# Altium PCB inversor_rev3.PcbDoc
Units mm, origin at the board's own origin, x right, y up, seen from the top; angles counter-clockwise.
Board outline 100.08 x 99.8 mm, 2 copper layers (Top Layer, Bottom Layer); 102 components, 66 nets, 314 pads, 278 vias.
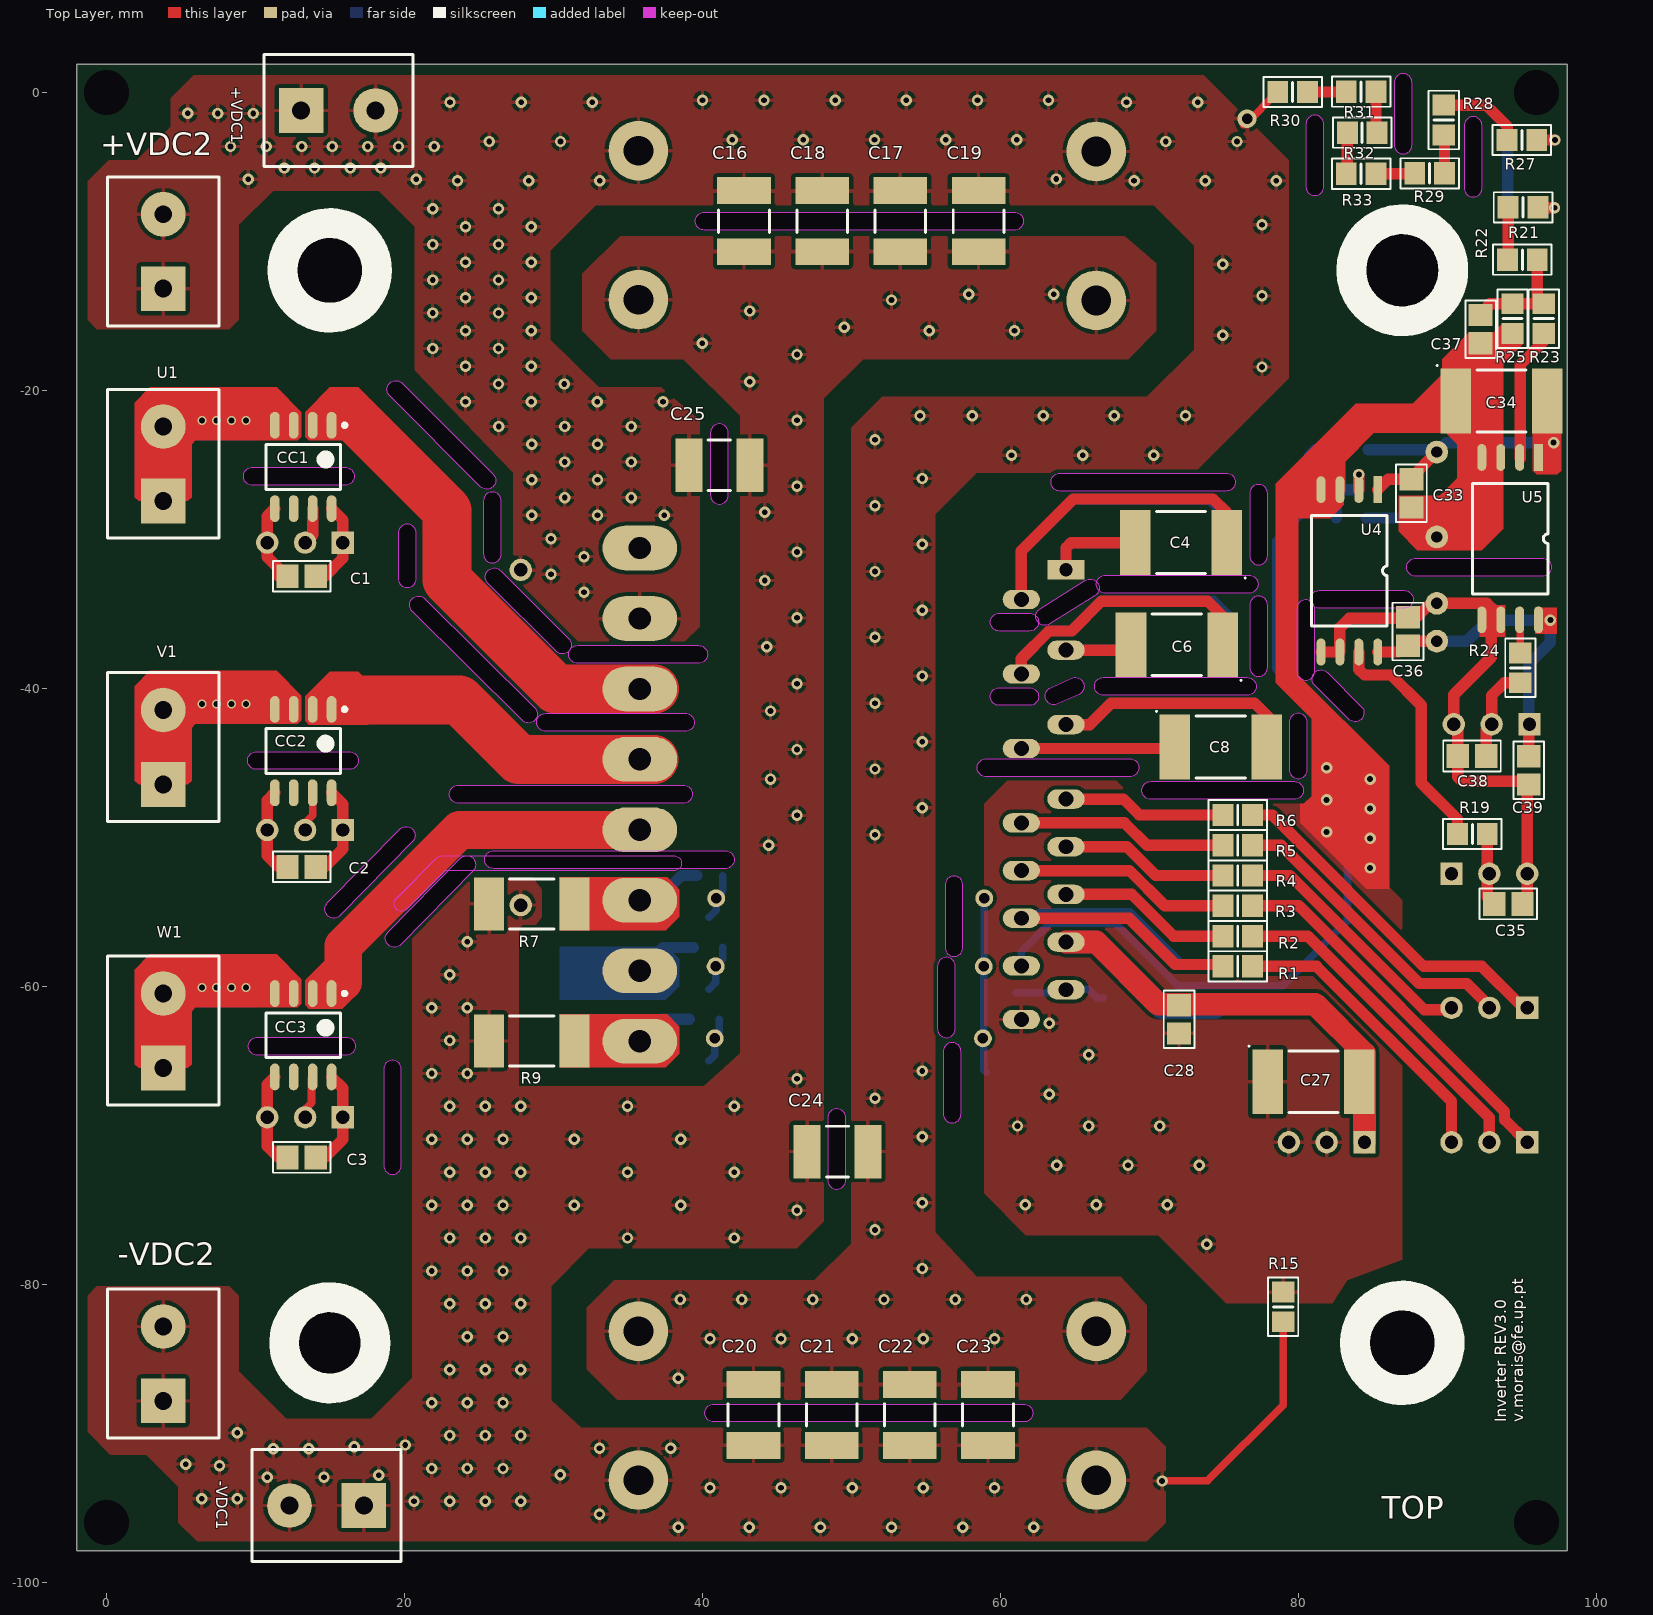
[diagram p0: Top Layer view]
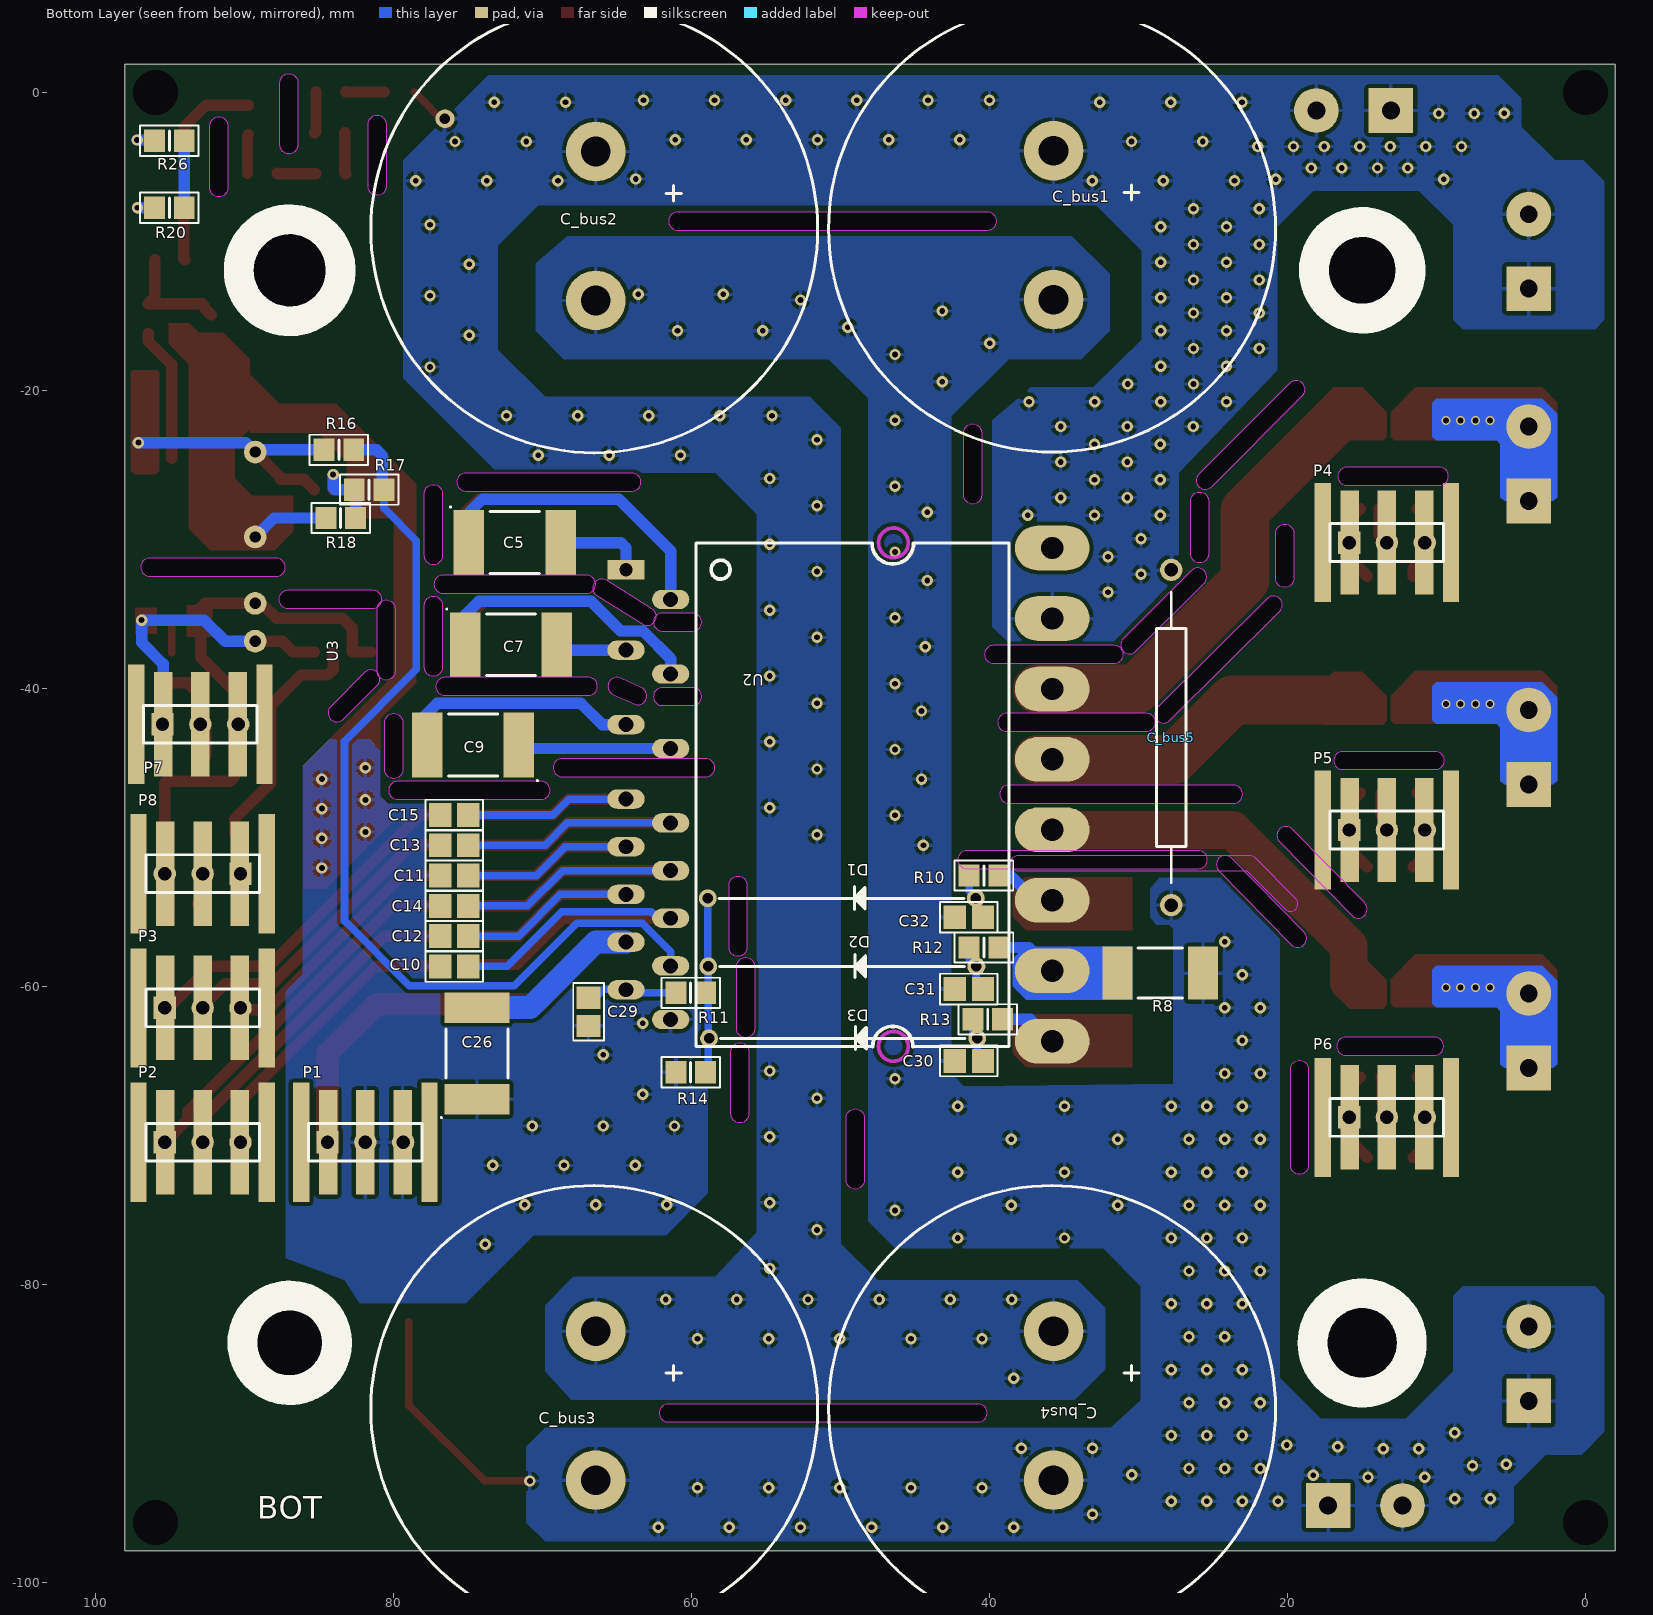
[diagram p1: Bottom Layer view, seen from below]

## Layer stack, top to bottom
Top Solder: solder mask 0.0102, Solder Resist, Dk 3.5
Top Layer: signal copper 0.0356
Dielectric 1: dielectric 0.32, FR-4, Dk 4.8
Bottom Layer: signal copper 0.0356
Bottom Solder: solder mask 0.0102, Solder Resist, Dk 3.5

## Board outline
-2,-97.905 98.075,-97.905 98.075,1.892 -2,1.892
cut-out: 83.395,-42.069 81.109,-39.783 cw(c81.534,-39.358) 81.959,-38.933 84.245,-41.219 cw(c83.82,-41.644) 84.42,-41.644 cw(c83.82,-41.644)
cut-out: 79.918,-38.85 ccw(c80.518,-38.85) 81.118,-38.85 81.118,-34.659 ccw(c80.518,-34.659) 79.918,-34.659
cut-out: 81.407,-34.624 cw(c81.407,-34.024) 81.407,-33.424 87.122,-33.424 cw(c87.122,-34.024) 87.722,-34.024 cw(c87.122,-34.024) 87.122,-34.624
cut-out: 87.884,-32.465 cw(c87.884,-31.865) 87.884,-31.265 96.393,-31.265 cw(c96.393,-31.865) 96.993,-31.865 cw(c96.393,-31.865) 96.393,-32.465
cut-out: 91.144,-6.414 ccw(c91.745,-6.414) 92.345,-6.414 92.345,-2.223 ccw(c91.745,-2.223) 91.144,-2.223
cut-out: 86.445,-3.519 ccw(c87.046,-3.519) 87.646,-3.519 87.646,0.672 ccw(c87.046,0.672) 86.445,0.672
cut-out: 80.527,-6.313 ccw(c81.128,-6.313) 81.728,-6.313 81.728,-2.122 ccw(c81.128,-2.122) 80.527,-2.122
cut-out: 64.008,-26.75 cw(c64.008,-26.15) 64.008,-25.55 75.184,-25.55 cw(c75.184,-26.15) 75.784,-26.15 cw(c75.184,-26.15) 75.184,-26.75
cut-out: 76.743,-31.103 ccw(c77.343,-31.103) 77.943,-31.103 77.943,-26.912 ccw(c77.343,-26.912) 76.743,-26.912
cut-out: 76.743,-38.596 ccw(c77.343,-38.596) 77.943,-38.596 77.943,-34.405 ccw(c77.343,-34.405) 76.743,-34.405
cut-out: 67.056,-33.608 cw(c67.056,-33.008) 67.056,-32.408 76.708,-32.408 cw(c76.708,-33.008) 77.308,-33.008 cw(c76.708,-33.008) 76.708,-33.608
cut-out: 63.31,-35.676 cw(c62.992,-35.167) 62.674,-34.658 65.722,-32.753 cw(c66.04,-33.262) 66.64,-33.262 cw(c66.04,-33.262) 66.358,-33.771
cut-out: 59.944,-36.148 cw(c59.944,-35.548) 59.944,-34.948 61.976,-34.948 cw(c61.976,-35.548) 62.576,-35.548 cw(c61.976,-35.548) 61.976,-36.148
cut-out: 59.944,-41.148 cw(c59.944,-40.548) 59.944,-39.948 61.976,-39.948 cw(c61.976,-40.548) 62.576,-40.548 cw(c61.976,-40.548) 61.976,-41.148
cut-out: 63.875,-41.048 cw(c63.627,-40.501) 63.379,-39.954 64.776,-39.319 cw(c65.024,-39.866) 65.624,-39.866 cw(c65.024,-39.866) 65.272,-40.413
cut-out: 66.929,-40.466 cw(c66.929,-39.866) 66.929,-39.266 76.581,-39.266 cw(c76.581,-39.866) 77.181,-39.866 cw(c76.581,-39.866) 76.581,-40.466
cut-out: 79.41,-45.454 ccw(c80.01,-45.454) 80.61,-45.454 80.61,-42.279 ccw(c80.01,-42.279) 79.41,-42.279
cut-out: 70.104,-47.451 cw(c70.104,-46.851) 70.104,-46.251 79.756,-46.251 cw(c79.756,-46.851) 80.356,-46.851 cw(c79.756,-46.851) 79.756,-47.451
cut-out: 59.055,-45.927 cw(c59.055,-45.327) 59.055,-44.727 68.707,-44.727 cw(c68.707,-45.327) 69.307,-45.327 cw(c68.707,-45.327) 68.707,-45.927
cut-out: 40.767,-89.246 cw(c40.767,-88.646) 40.767,-88.046 61.595,-88.046 cw(c61.595,-88.646) 62.195,-88.646 cw(c61.595,-88.646) 61.595,-89.246
cut-out: 56.169,-68.568 ccw(c56.769,-68.568) 57.369,-68.568 57.369,-64.377 ccw(c56.769,-64.377) 56.169,-64.377
cut-out: 55.788,-62.853 ccw(c56.388,-62.853) 56.988,-62.853 56.988,-58.662 ccw(c56.388,-58.662) 55.788,-58.662
cut-out: 56.296,-57.392 ccw(c56.896,-57.392) 57.496,-57.392 57.496,-53.201 ccw(c56.896,-53.201) 56.296,-53.201
cut-out: 48.422,-73.013 ccw(c49.022,-73.013) 49.622,-73.013 49.622,-68.822 ccw(c49.022,-68.822) 48.422,-68.822
cut-out: 40.132,-9.236 cw(c40.132,-8.636) 40.132,-8.036 60.96,-8.036 cw(c60.96,-8.636) 61.56,-8.636 cw(c60.96,-8.636) 60.96,-9.236
cut-out: 40.548,-27.039 ccw(c41.148,-27.039) 41.748,-27.039 41.748,-22.848 ccw(c41.148,-22.848) 40.548,-22.848
cut-out: 9.804,-26.361 cw(c9.804,-25.761) 9.804,-25.161 16.027,-25.161 cw(c16.027,-25.761) 16.627,-25.761 cw(c16.027,-25.761) 16.027,-26.361
cut-out: 25.102,-26.46 19.006,-20.364 cw(c19.431,-19.939) 19.856,-19.514 25.952,-25.61 cw(c25.527,-26.035) 26.127,-26.035 cw(c25.527,-26.035)
cut-out: 25.308,-30.976 ccw(c25.908,-30.976) 26.508,-30.976 26.508,-27.42 ccw(c25.908,-27.42) 25.308,-27.42
cut-out: 30.182,-37.509 25.61,-32.937 cw(c26.035,-32.512) 26.46,-32.087 31.032,-36.659 cw(c30.607,-37.084) 31.207,-37.084 cw(c30.607,-37.084)
cut-out: 31.623,-38.319 cw(c31.623,-37.719) 31.623,-37.119 39.751,-37.119 cw(c39.751,-37.719) 40.351,-37.719 cw(c39.751,-37.719) 39.751,-38.319
cut-out: 19.593,-32.627 ccw(c20.193,-32.627) 20.793,-32.627 20.793,-29.579 ccw(c20.193,-29.579) 19.593,-29.579
cut-out: 27.909,-42.153 20.532,-34.831 cw(c20.955,-34.405) 21.378,-33.979 28.755,-41.301 cw(c28.332,-41.727) 28.932,-41.727 cw(c28.332,-41.727)
cut-out: 29.475,-42.879 cw(c29.475,-42.279) 29.475,-41.679 38.862,-41.679 cw(c38.862,-42.279) 39.462,-42.279 cw(c38.862,-42.279) 38.862,-42.879
cut-out: 10.084,-45.445 cw(c10.084,-44.844) 10.084,-44.244 16.307,-44.244 cw(c16.307,-44.844) 16.907,-44.844 cw(c16.307,-44.844) 16.307,-45.445
cut-out: 23.622,-47.705 cw(c23.622,-47.105) 23.622,-46.505 38.735,-46.505 cw(c38.735,-47.105) 39.335,-47.105 cw(c38.735,-47.105) 38.735,-47.705
cut-out: 25.984,-52.1 cw(c25.984,-51.499) 25.984,-50.899 41.54,-50.899 cw(c41.54,-51.499) 42.141,-51.499 cw(c41.54,-51.499) 41.54,-52.1
cut-out: 19.758,-57.203 cw(c19.329,-56.782) 18.9,-56.362 23.752,-51.409 cw(c24.181,-51.829) 24.781,-51.829 cw(c24.181,-51.829) 24.61,-52.25
cut-out: 15.694,-55.247 cw(c15.265,-54.827) 14.836,-54.406 19.688,-49.453 cw(c20.117,-49.874) 20.717,-49.874 cw(c20.117,-49.874) 20.546,-50.294
cut-out: 10.135,-64.622 cw(c10.135,-64.021) 10.135,-63.421 16.104,-63.421 cw(c16.104,-64.021) 16.704,-64.021 cw(c16.104,-64.021) 16.104,-64.622
cut-out: 18.602,-72.022 ccw(c19.202,-72.022) 19.803,-72.022 19.803,-65.571 ccw(c19.202,-65.571) 18.602,-65.571

## Design rules (kind name [scope] priority, off if disabled: settings)
Clearance [All] p1: gap=0.254 ignorepadtopadclearanceinfootprint=FALSE
Height [All] p1: minheight=0 maxheight=254 prefheight=12.7
HoleSize [All] p1: absolutevalues=TRUE maxlimit=25.4 minlimit=0.025 maxpercent=80.000 minpercent=20.000
PlaneClearance [All] p1: clearance=2.54
PolygonConnect [All] p1: connectstyle=Relief reliefconductorwidth=0.254 reliefentries=4 polygonreliefangle="90 Angle" airgapwidth=0.254
RoutingVias [All] p1: holewidth=0.711 width=1.27 viastyle="Through Hole" minholewidth=0.711 minwidth=1.27 maxholewidth=0.711 maxwidth=1.27
SilkToSilkClearance [All] p1: silktosilkclearance=0.025
SilkToSolderMaskClearance [IsPad] p1: minsilkscreentomaskgap=0.025 clearancetoexposedcopper=TRUE
SolderMaskExpansion [All] p1: expansion=0.102
Width [All] p1: maxlimit=3.81 minlimit=0.254 preferedwidth=0.762
25 further rules are at their usual default settings.

## Components (designator, comment, footprint, x,y, rotation, side; value= is the part's Value field where it differs from the comment)
+VDC1 "P 2p 5mm" connector1x2_parafuso 15.57,-1.207 r0 top
+VDC2 "P 2p 5mm" connector1x2_parafuso 3.81,-10.668 r90 top
-VDC1 "P 2p 5mm" connector1x2_parafuso 14.783,-94.857 r180 top
-VDC2 "P 2p 5mm" connector1x2_parafuso 3.81,-85.332 r90 top
C1 "C 10uF 0805 MLCC 25V X5R" CAPC_0805 13.106,-32.475 r0 top
C2 "C 10uF 0805 MLCC 25V X5R" CAPC_0805 13.106,-51.982 r0 top
C3 "C 10uF 0805 MLCC 25V X5R" CAPC_0805 13.106,-71.489 r0 top
C4 "C 10uF 2917 TANT 50V" CAPC_2917 72.136,-30.214 r180 top
C5 "C 10uF 2917 TANT 50V" CAPC_2917 71.882,-30.214 r180 bottom
C6 "C 10uF 2917 TANT 50V" CAPC_2917 71.855,-37.072 r180 top
C7 "C 10uF 2917 TANT 50V" CAPC_2917 72.136,-37.072 r180 bottom
C8 "C 10uF 2917 TANT 50V" CAPC_2917 74.803,-43.93 r0 top
C9 "C 10uF 2917 TANT 50V" CAPC_2917 74.676,-43.803 r0 bottom
C10 "C 1nF 0805 MLCC 50V X7R" CAPC_0805 75.946,-58.662 r180 bottom
C11 "C 1nF 0805 MLCC 50V X7R" CAPC_0805 75.946,-52.566 r180 bottom
C12 "C 1nF 0805 MLCC 50V X7R" CAPC_0805 75.946,-56.63 r180 bottom
C13 "C 1nF 0805 MLCC 50V X7R" CAPC_0805 75.946,-50.534 r180 bottom
C14 "C 1nF 0805 MLCC 50V X7R" CAPC_0805 75.946,-54.598 r180 bottom
C15 "C 1nF 0805 MLCC 50V X7R" CAPC_0805 75.946,-48.502 r180 bottom
C16 "C 100nF MLCC 1812 X7R 1kV" CAPC_1812 42.799,-8.636 r90 top
C17 "C 100nF MLCC 1812 X7R 1kV" CAPC_1812 53.298,-8.636 r90 top
C18 "C 100nF MLCC 1812 X7R 1kV" CAPC_1812 48.048,-8.636 r90 top
C19 "C 100nF MLCC 1812 X7R 1kV" CAPC_1812 58.547,-8.636 r90 top
C20 "C 100nF MLCC 1812 X7R 1kV" CAPC_1812 43.434,-88.773 r90 top
C21 "C 100nF MLCC 1812 X7R 1kV" CAPC_1812 48.683,-88.773 r90 top
C22 "C 100nF MLCC 1812 X7R 1kV" CAPC_1812 53.933,-88.773 r90 top
C23 "C 100nF MLCC 1812 X7R 1kV" CAPC_1812 59.182,-88.773 r90 top
C24 "C 100nF MLCC 1812 X7R 1kV" CAPC_1812 49.073,-71.095 r0 top
C25 "C 100nF MLCC 1812 X7R 1kV" CAPC_1812 41.148,-25.019 r180 top
C26 "C 10uF 2917 TANT 50V" CAPC_2917 74.422,-64.504 r90 bottom
C27 "C 10uF 2917 TANT 50V" CAPC_2917 81.026,-66.409 r0 top
C28 "C 10uF 0805 MLCC 25V X5R" CAPC_0805 72.009,-62.218 r90 top
C29 "C 10nF 0805 MLCC 50V X7R" CAPC_0805 66.929,-61.71 r90 bottom
C30 "C 10nF 0805 MLCC 50V X7R" CAPC_0805 41.402,-65.012 r180 bottom
C31 "C 10nF 0805 MLCC 50V X7R" CAPC_0805 41.402,-60.186 r180 bottom
C32 "C 10nF 0805 MLCC 50V X7R" CAPC_0805 41.402,-55.36 r180 bottom
C33 "C 10uF 0805 MLCC 25V X5R" CAPC_0805 87.605,-26.912 r90 top
C34 "C 10uF 2917 TANT 50V" CAPC_2917 93.65,-20.714 r0 top
C35 "C1uF 0805 MLCC 50V X5R" CAPC_0805 94.107,-54.471 r180 top
C36 "C 10uF 0805 MLCC 25V X5R" CAPC_0805 87.376,-36.183 r270 top
C37 "C1uF 0805 MLCC 50V X5R" CAPC_0805 92.253,-15.888 r90 top
C38 "C1uF 0805 MLCC 50V X5R" CAPC_0805 91.669,-44.54 r0 top
C39 "C 10uF 0805 MLCC 25V X5R" CAPC_0805 95.479,-45.505 r90 top
C_bus1 "C 470uF EleCap TH 450V" Capacitor_DCBUS 30.48,-14.212 r90 bottom
C_bus2 "C 470uF EleCap TH 450V" Capacitor_DCBUS 61.214,-14.263 r90 bottom
C_bus3 "C 470uF EleCap TH 450V" Capacitor_DCBUS 61.214,-93.46 r90 bottom
C_bus4 "C 470uF EleCap TH 450V" Capacitor_DCBUS 30.48,-93.46 r90 bottom
C_bus5 "C 470nF PPCap TH 630V" Snubber_cap_0.47uF 27.813,-54.547 r90 bottom
CC1 "IC CC 30A SO-8" CC6303_SOP8 13.208,-25.134 r270 top
CC2 "IC CC 30A SO-8" CC6303_SOP8 13.208,-44.209 r270 top
CC3 "IC CC 30A SO-8" CC6303_SOP8 13.208,-63.285 r270 top
D1 "IC DIO generic" Diode_th 40.928,-54.09 r0 bottom
D2 "IC DIO generic" Diode_th 40.894,-58.662 r0 bottom
D3 "IC DIO generic" Diode_th 40.84,-63.494 r0 bottom
P1 "P 8p 2.54 SR DW 3P" MOLEX_3p_105431_1103 81.915,-70.473 r180 bottom
P2 "P 8p 2.54 SR DW 3P" MOLEX_3p_105431_1103 92.837,-70.473 r180 bottom
P3 "P 8p 2.54 SR DW 3P" MOLEX_3p_105431_1103 92.837,-61.446 r180 bottom
P4 "P 8p 2.54 SR DW 3P" MOLEX_3p_105431_1103 13.335,-30.214 r180 bottom
P5 "P 8p 2.54 SR DW 3P" MOLEX_3p_105431_1103 13.335,-49.505 r180 bottom
P6 "P 8p 2.54 SR DW 3P" MOLEX_3p_105431_1103 13.335,-68.797 r180 bottom
P7 "P 8p 2.54 SR DW 3P" MOLEX_3p_105431_1103 92.989,-42.406 r180 bottom
P8 "P 8p 2.54 SR DW 3P" MOLEX_3p_105431_1103 92.837,-52.439 r0 bottom
R1 "R 100 1/8W 0805 1%" RESC_0805 75.946,-58.662 r0 top
R2 "R 100 1/8W 0805 1%" RESC_0805 75.946,-56.63 r0 top
R3 "R 100 1/8W 0805 1%" RESC_0805 75.946,-54.598 r0 top
R4 "R 100 1/8W 0805 1%" RESC_0805 75.946,-52.566 r0 top
R5 "R 100 1/8W 0805 1%" RESC_0805 75.946,-50.534 r0 top
R6 "R 100 1/8W 0805 1%" RESC_0805 75.946,-48.502 r0 top
R7 "R 0039 3W 6432 1%" RESC6432X09M 28.55,-54.471 r180 top
R8 "R 0039 3W 6432 1%" RESC6432X09M 28.55,-59.119 r180 bottom
R9 "R 0039 3W 6432 1%" RESC6432X09M 28.55,-63.666 r180 top
R10 "R 100 1/8W 0805 1%" RESC_0805 40.386,-52.566 r0 bottom
R11 "R 1k8 1/8W 0805 1%" RESC_0805 60.071,-60.44 r0 bottom
R12 "R 100 1/8W 0805 1%" RESC_0805 40.386,-57.392 r0 bottom
R13 "R 100 1/8W 0805 1%" RESC_0805 40.132,-62.218 r0 bottom
R14 "R 3K 1/8W 0805 1%" RESC_0805 60.071,-65.774 r180 bottom
R15 "R 0 1/8W 0805" RESC_0805 78.994,-81.522 r270 top
R16 "R 3k6 1/8W 0805 1%" RESC_0805 83.693,-23.991 r180 bottom
R17 "R 49k9 1/8W 0805 1%" RESC_0805 81.661,-26.658 r0 bottom
R18 "R 49k9 1/8W 0805 1%" RESC_0805 83.566,-28.563 r180 bottom
R19 "R 330 1/8 0805 1%" RESC_0805 91.694,-49.772 r0 top
R20 "R 30k 1/8W 0805 1%" RESC_0805 95.072,-7.735 r0 bottom
R21 "R 30k 1/8W 0805 1%" RESC_0805 95.098,-7.71 r180 top
R22 "R 30k 1/8W 0805 1%" RESC_0805 95.047,-11.215 r0 top
R23 "R 30k 1/8W 0805 1%" RESC_0805 96.495,-15.177 r270 top
R24 "R 330 1/8 0805 1%" RESC_0805 94.92,-38.621 r270 top
R25 "R 150R 1/8W 0805 1%" RESC_0805 94.386,-15.177 r90 top
R26 "R 30k 1/8W 0805 1%" RESC_0805 95.072,-3.239 r0 bottom
R27 "R 30k 1/8W 0805 1%" RESC_0805 95.021,-3.188 r180 top
R28 "R 30k 1/8W 0805 1%" RESC_0805 89.774,-1.845 r270 top
R29 "R 30k 1/8W 0805 1%" RESC_0805 88.824,-5.424 r180 top
R30 "R 30k 1/8W 0805 1%" RESC_0805 79.629,0.037 r0 top
R31 "R 30k 1/8W 0805 1%" RESC_0805 84.226,0.063 r0 top
R32 "R 30k 1/8W 0805 1%" RESC_0805 84.303,-2.693 r180 top
R33 "R 30k 1/8W 0805 1%" RESC_0805 84.226,-5.449 r0 top
U1 "P 2p 5mm" connector1x2_parafuso 3.81,-24.92 r90 top
U2 "IC IGBT IPM  IKCM30F60GA" ikcm30f60ga 64.414,-32.032 r180 bottom
U3 "IC CC/CC 1W 5V" DC/DC_ISO 89.306,-36.833 r90 bottom
U4 "IC AmpIso UNI AMC1311" "AMC1311 - SOIC8" 85.344,-26.658 r270 top
U5 "IC AmpIso UNI AMC1311" "AMC1311 - SOIC8" 96.139,-24.499 r270 top
V1 "P 2p 5mm" connector1x2_parafuso 3.81,-43.95 r90 top
W1 "P 2p 5mm" connector1x2_parafuso 3.81,-62.98 r90 top

## Footprints (in the part's own frame and the unit in brackets; to place one, negate y for a bottom-side part, rotate by r counter-clockwise, add the part's x,y. Pads: shape width x height; smd on the part's side, far side on the other; paste and mask are expansions set on the pad)
"AMC1311 - SOIC8" [mm]
  rect 1.8x0.6 smd: 1(0,0)
  oval 1.8x0.6 smd: 2(0,-1.27) 3(0,-2.54) 4(0,-3.81) 5(10.9,-3.81) 6(10.9,-2.54) 7(10.9,-1.27) 8(10.9,0)
  silkscreen extent 1.73,-4.44 9.17,0.64, body extent 1.7,-4.52 9.22,0.69, height 3
Capacitor_DCBUS [mm]
  round 4 hole 2: 1(0.305,5.232) 2(10.305,5.232)
  silkscreen extent -9.92,-9.67 20.08,20.33, body extent -9.67,-9.92 20.33,20.08, height 41
CAPC_0805 [mm] "Chip Capacitor, Body 2.0x1.3mm, IPC Low Density"
  rect 1.5x1.6 smd: 1(-0.95,0) 2(0.95,0)
  silkscreen extent -1.93,-1.03 1.93,1.03, body extent -1.1,-0.72 1.1,0.72, height 1.1
CAPC_1812 [mm] "Chip Capacitor, 2-Leads, Body 4,50x3,20mm, IPC Low Density"
  rect 1.8x3.6 smd: 1(-2.05,0) 2(2.05,0)
  silkscreen extent -0.75,-1.7 0.75,1.7, body extent -2.4,-1.75 2.4,1.75, height 2.6
CAPC_2917 [mm] "Chip Capacitor, 2-Leads, Body 7,30x4,20mm, IPC Medium Density"
  rect 2.05x4.35 smd: 1(-3.075,0) 2(3.075,0)
  silkscreen extent -4.36,-2.07 1.65,2.44, body extent -3.75,-2.15 3.75,2.15, height 4
CC6303_SOP8 [mm] "SOP, 8-Leads, Body 4,90x3,91mm, Pitch 1,27mm, IPC Medium Density"
  oval 1.8x0.65 smd: 1(-2.8,1.905) 2(-2.8,0.635) 3(-2.8,-0.635) 4(-2.8,-1.905) 5(2.8,-1.905) 6(2.8,-0.635) 7(2.8,0.635) 8(2.8,1.905)
  silkscreen extent -2.92,-2.5 1.5,2.91, body extent -1.9,-2.5 1.9,2.5, height 2.65
connector1x2_parafuso [mm] "Connector; Header; 2 Position"
  rect 3x3 hole 1.2: 1(-2.5,0)
  round 3 hole 1.2: 2(2.5,0)
  silkscreen extent -5,-3.75 5,3.75, body extent -4.92,-4.53 5.68,4.47, height 14.6
DC/DC_ISO [mil]
  round 60 hole 30: 1(0,0) 2(100,0) 3(275.59,0) 4(500,0)
  body extent -54,-149 572,80, height 315
Diode_th [mm]
  round 1.2 hole 0.7: 1(0,0) 2(18,0)
  silkscreen extent 0.81,-0.79 17.25,0.76, body extent -0.93,-0.75 19.07,0.77, height 1.76
ikcm30f60ga [mm]
  rect 2.5x1.3 hole 0.9: 1(0,0)
  oval 2.5x1.3 hole 1: 2(2.997,-2) 3(0,-5.4) 4(2.997,-7) 5(0,-10.4) 6(2.997,-12) 7(0,-15.4) 8(2.997,-17) 9(0,-18.6) 10(2.997,-20.2) 11(0,-21.8) 12(2.997,-23.4) 13(0,-25) 14(2.997,-26.6) 15(0,-28.2) 16(2.997,-30.2)
  oval 5x3 hole 1.5: 17(28.611,-31.655) 18(28.611,-26.925) 19(28.611,-22.195) 20(28.611,-17.465) 21(28.611,-12.735) 22(28.611,-8.005) 23(28.611,-3.275) 24(28.611,1.455)
  Top Layer keep-out circle w0.254: c17.95,-32 r1
  Top Layer keep-out circle w0.254: c17.95,1.8 r1
  silkscreen extent 4.7,-32 25.7,1.78, body extent -0.67,-33.2 29.16,3.1, height 1.3
MOLEX_3p_105431_1103 [mm] "conector 3p 2.5mm"
  rect 1.1x8 smd: 0(-4.305,0) 0(4.305,0)
  rect 1.5x1.5 hole 0.9: 1(-2.54,0)
  rect 1.24x7 smd: 1(-2.5,0) 2(0,0) 3(2.5,0)
  round 1.5 hole 0.9: 2(0,0) 3(2.54,0)
  silkscreen extent -3.81,-1.27 3.81,1.27, body extent -5.37,-4.14 5.36,4.11, height 11.3
RESC6432X09M [mm] "Chip Resistor, 2-Leads, Body 6,40x3,20mm, IPC Low Density"
  rect 2x3.55 smd: 1(-2.875,0) 2(2.875,0)
  silkscreen extent -1.5,-1.68 1.5,1.68, body extent -3.32,-1.73 3.32,1.73, height 0.9
RESC_0805 [mm] "Chip Resistor, Body 2.0x1.3mm, IPC Low Density"
  rect 1.4x1.5 smd: 1(-1,0) 2(1,0)
  silkscreen extent -1.96,-1.01 1.96,1.01, body extent -1.07,-0.7 1.08,0.7, height 0.65
Snubber_cap_0.47uF [mm]
  round 1.5 hole 0.9: 1(0,0) 2(22.5,0)
  silkscreen extent 1.5,-1 21,1, body extent -1.17,-9.45 23.67,-1.55, height 3

## Part data
+VDC1 +VDC2 -VDC1 -VDC2 U1 V1 W1: library part gen_purpose_conn_1x2, "Bloques de terminales de PCB de perfil estándar RS de 5,0 mm", Price=0,24, RS VPN=896-6696
C1 C2 C3 C28 C33 C36 C39: library part "Capacitor SMD", "Capacitores de cerâmica multicamada MLCC - SMD/SMT 10uF 25V X5R +/-10% 0805 Gen Purp", Mouser VPN=963-TMK212BBJ106KG-T, Price=0,162
C4 C5 C6 C7 C8 C9 C26 C27 C34: library part tantalum_CAP, "Condensadores de tântalo - revestimento sólido de SMD 50V 10uF 10% ESR=0.8Ohms", Mouser VPN=80-T491D106K050AT, Price=1,58
C10 C11 C12 C13 C14 C15: library part "Capacitor SMD", "Capacitores de cerâmica multicamada MLCC - SMD/SMT WCAP-CSGP 1000pF 0805 10% 50V MLCC", Mouser VPN=710-885012207086, Price=0,08
C16 C17 C18 C19 C20 C21 C22 C23 C24 C25: library part CAPACITOR_dcbus, "Capacitores de cerâmica multicamada MLCC - SMD/SMT 1000V 0.1uF X7R 1812 10% AEC-Q200", Mouser VPN=80-C1812C104KDRAUTO, Price=0,747
C29 C30 C31 C32: library part "Capacitor SMD", "Capacitores de cerâmica multicamada MLCC - SMD/SMT 10nF 50V X7R 10%", Mouser VPN=603-CC805KRX7R9BB103, Price=0,099
C35 C37 C38: library part "Capacitor SMD", "Capacitores de cerâmica multicamada MLCC - SMD/SMT 0805 50V 1uF 20% X5R", Mouser VPN=963-UMK212BJ105MG-T, Price=0,153
C_bus1 C_bus2 C_bus3 C_bus4: library part CAPACITOR_dcbus, "Capacitores eletrolíticos de alumínio - terminal de pressão 450V 470uF 20% Tol.", Mouser VPN=661-ESMR451N471MR40S, Price=6,28
C_bus5: library part CAPACITOR_dcbus, "B32653A6474K000 -  DC Film Capacitor, 0.47 µF, 630 V, Metallized PP, ± 10%, B32653 Series", Farnell VPN=9751343, Price=2,18
CC1 CC2 CC3: library part Current_Sensor_cc6303, "Sensores de Corrente de Montagem de Painel Hall Effect IC LF 30A 66 mV/A", Mouser VPN=630-ACHS-7123-000E, Price=3,47
D1 D2 D3: library part Diode, "Diodos - Fins gerais, energia, comutação Hi Conductance Fast", Mouser VPN=512-1N4148TR, Price=0,09
P1 P2 P3 P4 P5 P6 P7 P8: library part "Header 3", "Distribuidores e Alojamento de Fios CGrid Hrd SRDW THo le 8ckt", Mouser VPN=538-87937-0800, Price=0,621
R1 R2 R3 R4 R5 R6 R10 R12 R13: library part Resistor, "Resistores de Filme Espesso - SMD 1/8Watt 100ohms 1% Commercial Use", Mouser VPN=71-CRCW0805100RFKEAC, Price=0,09
R7 R8 R9: library part Resistor, "MCLRP12FTWRR039 -  SMD Current Sense Resistor, 0.039 ohm, LRP Series, 2512 [6432 Metric], 3 W, ± 1%, Metal Strip", Farnell VPN=2828259, Price=0,271
R11: library part Resistor, "Resistores de Filme Espesso - SMD ResA-AS 0805 1k8 1% 125mW TC100", Mouser VPN=652-CR0805AFX1801EAS, Price=0,09
R14: library part Resistor, "Resistores de Filme Espesso - SMD 1/8watt 3Kohms 1% 100ppm", Mouser VPN=71-CRCW0805-3K-E3, Price=0,09
R15: library part Resistor, "Resistores de Filme Espesso - SMD 1/8Watt 0ohms Commercial Use", Mouser VPN=71-CRCW08050000Z0EAC, Price=0,09
R16: library part Resistor, "Resistores de Filme Espesso - SMD 1/8watt 3.6Kohms 1%", Mouser VPN=71-CRCW08053K60FKEA, Price=0,09
R17 R18: library part Resistor, "Resistores de Filme Espesso - SMD 1/8Watt 49.9Kohms 1% Commercial Use", Mouser VPN=71-CRCW080549K9FKEAC, Price=0,09
R19 R24: library part Resistor, "Resistores de Filme Espesso - SMD 1/8Watt 330ohms 1% Commercial Use", Mouser VPN=71-CRCW0805330RFKEAC, Price=0,09
R20 R21 R22 R23 R26 R27 R28 R29 R30 R31 R32 R33: library part Resistor, "Resistores de Filme Espesso - SMD 0805 30Kohms 1% AEC-Q200", Mouser VPN=667-ERJ-6ENF3002V, Price=0,09
R25: library part Resistor, "Resistores de Filme Espesso - SMD 1/8watt 150ohms 1% 100ppm", Mouser VPN=71-CRCW0805-150-E3, Price=0,09
U2: library part IKCM30F60GA, "Controladores e drivers de Motor/Movimento/Ignição IFPS MODULES", Mouser VPN=726-IKCM30F60GDXKMA1, Price=16,25
U3: library part DC/DC_ISO, "Conversores CC/CC com isolação 1W 5Vin 5Vout 200mA SIP7", Mouser VPN=919-RFB-0505S, Price=1,4
U4 U5: library part AMC1311, "Amplificadores de isolamento A 595-AMC1311DWV", Mouser VPN=595-AMC1311DWVR, Price=5,55

## Free pads (board coordinates)
  round 1.524 hole 3 unplated: 4(0,-96) 4(0,0) 4(96,0) 4(96,-96)
  round 2 hole 5: 5(14.995,-83.935) 6(86.995,-83.935) 7(86.995,-11.935) 8(14.995,-11.935)

## Via types
v1: diameter 0.762, hole 0.381, Top Layer to Bottom Layer, 253 vias
v2: diameter 0.762, hole 0.4, Top Layer to Bottom Layer, 12 vias
v3: diameter 0.6, hole 0.4, Top Layer to Bottom Layer, 12 vias
v4: diameter 1.27, hole 0.711, Top Layer to Bottom Layer, 1 vias

## Nets (pads, with @x,y where several pads share a name; then routed paths per layer and width w, separated by ;. In a path a pad name is that pad's centre, name@x,y a point inside that pad or via, vN(x,y) a via of type N, cw(c..) or ccw(c..) an arc to the next point about the centre after c; other vN are vias at no path point)
5gnd1: C1.1 CC1.5 P4.3 | length 5.1
  Top Layer w0.762: CC1.5 10.795,-28.442 10.795,-30.214 10.795,-31.179 11.556,-31.941 C1.1@11.556,-32.475
5gnd2: C2.1 CC2.5 P5.3 | length 5.5
  Top Layer w0.762: CC2.5 10.795,-47.517 10.795,-49.505 10.795,-51.22 C2.1@11.556,-51.982
5gnd3: C3.1 CC3.5 P6.3 | length 5.9
  Top Layer w0.762: CC3.5 10.795,-66.593 10.795,-68.797 10.795,-70.728 C3.1@11.556,-71.489
5gnd4: C35.1 C36.1 C38.1 C39.1 P7.3 P8.3 U3.2 U4.5 U4.6 U5.5 U5.6 | length 39.5
  Top Layer w0.762: U4.5 U4.6 82.804,-35.929 83.439,-35.294 87.884,-35.294 88.885,-34.293 U3.2 92.674,-34.293 92.989,-34.608 92.989,-35.497 92.964,-35.523 92.964,-37.91 90.449,-40.425 90.449,-42.406 90.719,-42.675 C38.1 90.719,-45.952 91.008,-46.241 95.265,-46.241 95.377,-46.353 95.377,-52.439 95.377,-54.151 C35.1
5VDC1: C1.2 CC1.8 P4.1 | length 5.4
  Top Layer w0.762: C1.2@14.656,-32.475 15.875,-31.256 15.875,-30.214 15.875,-28.696 CC1.8
5VDC2: C2.2 CC2.8 P5.1 | length 5.8
  Top Layer w0.762: C2.2@14.656,-51.982 15.875,-50.763 15.875,-49.505 15.875,-47.771 CC2.8
5VDC3: C3.2 CC3.8 P6.1 | length 6.2
  Top Layer w0.762: C3.2@14.656,-71.489 15.875,-70.27 15.875,-68.797 15.875,-66.847 CC3.8
5Vdc4: C36.2 C39.2 P7.1 U3.1 U4.8 U5.8 | length 22.2
  Top Layer w0.762: U4.8 86.763,-37.558 87.488,-36.833 U3.1 ; C39.2 95.479,-42.457 P7.1@95.529,-42.406
  Bottom Layer w0.762: U3.1 91.323,-36.833 92.735,-35.421 v2(96.926,-35.421) 96.926,-36.92 95.489,-38.357 P7.1@95.489,-42.406
15VCC: C26.2 C27.2 C28.2 P1.1 U2.13 | length 40.9
  Top Layer w1.524: U2.13 66.442,-57.032 70.612,-61.202 81.153,-61.202 84.455,-64.504 P1.1@84.455,-70.473
  Bottom Layer w1.524: U2.13 66.442,-57.032 70.839,-61.429 C26.2
+VDCBUS: +VDC1.1 +VDC1.2 +VDC2.1 +VDC2.2 C16.2 C17.2 C18.2 C19.2 C20.2 C21.2 C22.2 C23.2 C24.2 C25.2 C_bus1.2 C_bus2.2 C_bus3.2 C_bus4.2 C_bus5.2 R30.1 U2.23 | length 3.7
  Top Layer w0.508: v4(76.577,-1.762) 76.327,-2.012 76.327,-2.147 76.445,-2.147 R30.1
  other v1: 38.379,-86.305 40.513,-83.663 45.288,-83.663 50.063,-83.663 54.839,-83.663 59.614,-83.663 38.519,-81.022 42.647,-81.022 47.422,-81.022 52.197,-81.022 56.972,-81.022 61.747,-81.022 54.774,-78.945 51.599,-76.354 54.774,-74.525 54.774,-70.106 51.599,-67.515 54.774,-65.686 51.599,-49.837 54.774,-48.008 51.599,-45.417 54.774,-43.588 51.599,-40.997 54.774,-39.169 51.599,-36.578 54.774,-34.749 32.055,-33.541 29.845,-32.348 51.599,-32.158 32.055,-31.154 54.774,-30.329 29.845,-29.96 28.55,-28.385 32.969,-28.385 37.44,-28.385 51.599,-27.739 30.759,-27.191 35.23,-27.191 28.55,-25.998 32.969,-25.998 54.774,-25.91 30.759,-24.804 35.23,-24.804 60.757,-24.347 65.532,-24.347 70.307,-24.347 28.55,-23.61 32.969,-23.61 51.599,-23.319 26.34,-22.416 30.759,-22.416 35.23,-22.416 54.61,-21.705 58.115,-21.705 62.89,-21.705 67.666,-21.705 72.441,-21.705 24.105,-20.765 28.524,-20.765 32.944,-20.765 37.363,-20.765 26.314,-19.571 30.734,-19.571 77.572,-18.428 24.105,-18.378 28.524,-18.378 21.895,-17.184 26.314,-17.184 74.93,-16.295 24.105,-15.99 28.524,-15.99 21.895,-14.796 26.314,-14.796 24.105,-13.78 28.524,-13.78 77.572,-13.653 21.895,-12.586 26.314,-12.586 74.93,-11.52 24.105,-11.393 28.524,-11.393 21.895,-10.199 26.314,-10.199 24.105,-9.005 28.524,-9.005 77.572,-8.878 21.895,-7.811 26.314,-7.811 23.571,-5.932 28.346,-5.932 33.122,-5.932 68.986,-5.932 73.762,-5.932 78.537,-5.932 9.525,-5.83 20.803,-5.83 63.754,-5.805 11.938,-5.068 13.97,-5.068 16.358,-5.068 18.415,-5.068 8.331,-3.62 10.719,-3.62 13.106,-3.62 15.164,-3.62 17.551,-3.62 19.609,-3.62 21.996,-3.62 25.705,-3.29 30.48,-3.29 71.12,-3.29 75.895,-3.29 42.012,-3.163 46.787,-3.163 51.562,-3.163 56.337,-3.163 61.112,-3.163 7.468,-1.41 9.855,-1.41 5.461,-1.397 23.063,-0.648 27.838,-0.648 32.614,-0.648 68.478,-0.648 73.254,-0.648 40.017,-0.521 44.145,-0.521 48.92,-0.521 53.696,-0.521 58.471,-0.521 63.246,-0.521
-VDCBUS: -VDC1.1 -VDC1.2 -VDC2.1 -VDC2.2 C16.1 C17.1 C18.1 C19.1 C20.1 C21.1 C22.1 C23.1 C24.1 C25.1 C30.1 C31.1 C32.1 C_bus1.1 C_bus2.1 C_bus3.1 C_bus4.1 C_bus5.1 R7.2 R8.2 R9.2 R15.2 | length 15.8
  Top Layer w0.508: v1(70.866,-93.206) 73.914,-93.206 78.994,-88.126 R15.2
  other v1: 38.379,-96.305 43.155,-96.305 47.93,-96.305 52.705,-96.305 57.48,-96.305 62.255,-96.305 33.096,-95.441 20.65,-94.578 23.038,-94.578 25.425,-94.578 27.813,-94.578 6.401,-94.4 8.788,-94.4 40.513,-93.663 45.288,-93.663 50.063,-93.663 54.839,-93.663 59.614,-93.663 10.795,-92.952 14.605,-92.952 18.288,-92.825 30.455,-92.8 21.844,-92.368 24.232,-92.368 26.619,-92.368 7.595,-92.19 5.334,-92.075 11.201,-91.047 13.589,-91.047 33.096,-91.022 37.871,-91.022 16.637,-90.92 20.066,-90.793 23.038,-90.158 25.425,-90.158 27.813,-90.158 8.788,-89.98 21.844,-87.948 24.232,-87.948 26.619,-87.948 23.038,-85.738 25.425,-85.738 27.813,-85.738 24.232,-83.529 26.619,-83.529 23.038,-81.319 25.425,-81.319 27.813,-81.319 21.844,-79.109 24.232,-79.109 26.619,-79.109 23.038,-76.899 25.425,-76.899 27.813,-76.899 34.976,-76.899 42.139,-76.899 46.355,-75.045 21.844,-74.689 24.232,-74.689 26.619,-74.689 31.394,-74.689 38.557,-74.689 23.038,-72.48 25.425,-72.48 27.813,-72.48 34.976,-72.48 42.139,-72.48 21.844,-70.27 24.232,-70.27 26.619,-70.27 31.394,-70.27 38.557,-70.27 23.038,-68.06 25.425,-68.06 27.813,-68.06 34.976,-68.06 42.139,-68.06 46.355,-66.206 21.844,-65.85 24.232,-65.85 23.038,-63.64 21.844,-61.431 24.232,-61.431 23.038,-59.221 24.232,-57.011 44.45,-50.534 46.355,-48.527 44.577,-46.089 46.355,-44.108 44.577,-41.517 46.355,-39.688 44.336,-37.199 46.355,-35.269 44.196,-32.754 46.355,-30.849 44.196,-28.182 46.355,-26.429 46.355,-22.01 43.18,-19.419 46.355,-17.59 40.005,-16.828 55.245,-15.99 60.96,-15.99 49.53,-15.761 43.18,-14.669 52.705,-13.933 57.887,-13.552 63.602,-13.552
Gnd1: C10.1 C11.1 C12.1 C13.1 C14.1 C15.1 C26.1 C27.1 C28.1 C29.1 C33.1 C34.1 C37.1 P1.2 P1.3 R14.1 R15.1 R18.1 R25.1 U2.16 U3.3 U4.3 U4.4 U5.3 U5.4 | length 10.5
  Top Layer w0.762: U4.4 U4.3 82.804,-23.356 82.169,-23.356
  Bottom Layer w0.762: R18.1 88.036,-28.563 U3.3
  other v1: 73.863,-77.306 61.671,-74.664 66.446,-74.664 71.222,-74.664 63.805,-72.022 68.58,-72.022 73.355,-72.022 61.163,-69.381 65.938,-69.381 70.714,-69.381 63.297,-67.247 65.938,-64.606 63.297,-62.472
  other v2: 84.836,-52.058 84.836,-50.068 81.915,-49.645 84.836,-48.079 81.915,-47.486 84.836,-46.089 81.915,-45.327
I_U: CC1.7 P4.2 | length 2.5
  Top Layer w0.762: P4.2@13.335,-30.214 13.843,-29.706 CC1.7
I_V: CC2.7 P5.2 | length 2.7
  Top Layer w0.508: P5.2@13.335,-49.505 13.335,-49.035 13.843,-48.527 CC2.7
I_W: CC3.7 P6.2 | length 2.9
  Top Layer w0.508: P6.2@13.335,-68.797 13.335,-68.238 13.767,-67.806 13.767,-66.161 CC3.7
IN_UH: C15.2 R6.1 U2.7 | length 22
  Top Layer w0.762: U2.7 68.272,-47.432 69.342,-48.502 R6.1
  Bottom Layer w0.508: U2.7 68.272,-47.432 69.342,-48.502 C15.2
IN_UL: C14.2 R3.1 U2.10 | length 29.1
  Top Layer w0.762: U2.10 68.674,-52.232 71.04,-54.598 R3.1
  Bottom Layer w0.508: U2.10 68.674,-52.232 71.04,-54.598 C14.2
IN_VH: C13.2 R5.1 U2.8 | length 28.7
  Top Layer w0.762: U2.8 68.348,-49.032 69.85,-50.534 74.93,-50.534 R5.1@75.184,-50.788
  Bottom Layer w0.508: U2.8 68.348,-49.032 69.85,-50.534 C13.2
IN_VL: C12.2 R2.1 U2.11 | length 23.4
  Top Layer w0.762: U2.11 68.837,-53.832 71.635,-56.63 R2.1
  Bottom Layer w0.508: U2.11 68.83,-53.832 71.628,-56.63 C12.2
IN_WH: C11.2 R4.1 U2.9 | length 22.7
  Top Layer w0.762: U2.9 68.511,-50.632 70.445,-52.566 R4.1
  Bottom Layer w0.508: U2.9 68.511,-50.632 70.445,-52.566 C11.2
IN_WL: C10.2 R1.1 U2.12 | length 30.1
  Top Layer w0.762: U2.12 68.652,-55.432 71.755,-58.535 74.819,-58.535 R1.1
  Bottom Layer w0.508: U2.12 62.285,-55.432 62.717,-55 68.728,-55 72.39,-58.662 C10.2
iTRIP: C29.2 R11.2 U2.15 | length 6.2
  Bottom Layer w0.508: R11.2 64.206,-60.44 U2.15 64.46,-60.186 65.913,-60.186 66.487,-60.76 C29.2
NetC4_1: C4.1 C5.1 U2.2 | length 43.1
  Top Layer w0.762: U2.2 61.417,-30.773 64.905,-27.285 74.287,-27.285 75.211,-28.209 C4.1 C4.1@75.211,-31.838
  Bottom Layer w0.762: U2.2 61.417,-30.773 64.897,-27.293 74.041,-27.293 74.957,-28.209 C5.1
NetC4_2: C4.2 C5.2 U2.1 | length 12.3
  Top Layer w0.762: U2.1 64.414,-30.57 64.77,-30.214 C4.2
  Bottom Layer w0.762: U2.1 64.414,-30.57 64.77,-30.214 C5.2
NetC6_1: C6.1 C7.1 U2.4 | length 37.3
  Top Layer w0.762: U2.4 61.417,-38.011 63.282,-36.147 64.806,-36.147 66.81,-34.143 73.914,-34.143 74.93,-35.159 C6.1
  Bottom Layer w0.762: U2.4 61.417,-38.011 63.282,-36.147 64.77,-36.147 66.766,-34.151 74.295,-34.151 75.211,-35.067 C7.1
NetC6_2: C6.2 C7.2 U2.3 | length 9.4
  Top Layer w0.762: U2.3 68.42,-37.432 C6.2
  Bottom Layer w0.762: U2.3 C7.2@69.319,-37.432
NetC8_1: C8.1 C9.1 U2.6 | length 21.7
  Top Layer w0.762: U2.6 C8.1@72.136,-44.032 ; C8.1@71.984,-44.032 C8.1@72.136,-44.184
  Bottom Layer w0.762: U2.6 C9.1@72.136,-44.032
NetC8_2: C8.2 C9.2 U2.5 | length 34.1
  Top Layer w0.762: U2.5 66.014,-42.432 67.445,-41.001 77.051,-41.001 77.066,-40.986 78.286,-42.206 C8.2@78.286,-44.184
  Bottom Layer w0.762: U2.5 66.014,-42.432 67.437,-41.009 77.089,-41.009 78.259,-42.179 C9.2@78.259,-44.438
NetC30_2: C30.2 D3.1 R13.2 | length 3.1
  Bottom Layer w0.508: C30.2 40.84,-64.624 D3.1 41.132,-63.202 R13.2
NetC31_2: C31.2 D2.1 R12.2 | length 3.2
  Bottom Layer w0.508: C31.2 40.894,-59.744 D2.1 41.386,-58.17 R12.2
NetC32_2: C32.2 D1.1 R10.2 | length 3.2
  Bottom Layer w0.508: C32.2 40.928,-54.884 D1.1 41.386,-53.632 R10.2
NetC37_2: C37.2 R22.2 R23.1 R25.2 | length 7.8
  Top Layer w0.762: C37.2 92.71,-14.481 92.71,-14.339 92.872,-14.177 R23.1 96.047,-13.729 R22.2
NetCC1_1: CC1.1 CC1.2 U2.22 | length 30.5
  Top Layer w3.302: 16.548,-21.743 22.86,-28.055 22.86,-32.729 30.168,-40.037 U2.22@36.779,-40.037
NetCC1_3: CC1.3 CC1.4 U1.1 U1.2
  other v3: 6.401,-22.006 7.391,-22.006 8.382,-22.006 9.373,-22.006
NetCC2_1: CC2.1 CC2.2 U2.21 | length 22.1
  Top Layer w3.302: 16.281,-40.78 23.698,-40.78 27.684,-44.767 U2.21@36.754,-44.767
NetCC2_3: CC2.3 CC2.4 V1.1 V1.2
  other v3: 6.401,-41.036 7.391,-41.036 8.382,-41.036 9.373,-41.036
NetCC3_1: CC3.1 CC3.2 U2.20 | length 25.5
  Top Layer w2.54: 15.9,-59.703 15.9,-57.29 23.694,-49.497 U2.20
NetCC3_3: CC3.3 CC3.4 W1.1 W1.2
  other v3: 6.401,-60.066 7.391,-60.066 8.382,-60.066 9.373,-60.066
NetD1_2: D1.2 D2.2 D3.2 R11.1 R14.2 | length 11.8
  Bottom Layer w0.508: D1.2 58.928,-58.628 D2.2 58.894,-65.597 R14.2
NetP2_1: P2.1 R3.2 | length 25.3
  Top Layer w0.762: R3.2 80.05,-54.598 93.853,-68.401 93.853,-68.949 P2.1@95.377,-70.473
NetP2_2: P2.2 R2.2 | length 22.6
  Top Layer w0.762: R2.2 80.645,-56.63 92.837,-68.822 P2.2@92.837,-70.473
NetP2_3: P2.3 R1.2 | length 19.9
  Top Layer w0.762: R1.2 81.24,-58.662 90.297,-67.719 P2.3@90.297,-70.473
NetP3_1: P3.1 R6.2 | length 24
  Top Layer w0.762: R6.2 78.264,-48.502 88.424,-58.662 92.329,-58.662 94.932,-61.265 P3.1@95.694,-61.265
NetP3_2: P3.2 R5.2 | length 20.5
  Top Layer w0.762: R5.2 78.86,-50.534 88.134,-59.809 91.317,-59.809 92.748,-61.24 P3.2@92.748,-61.534
NetP3_3: P3.3 R4.2 | length 17.1
  Top Layer w0.762: R4.2 79.455,-52.566 88.472,-61.583 P3.3@90.297,-61.583
NetR17_2: R17.2 R18.2 U4.2 | length 5.3
  Top Layer w0.762: U4.2 v2(84.074,-25.642)
  Bottom Layer w0.762: R18.2 82.566,-26.753 R17.2 83.947,-26.658 84.074,-26.531 v2(84.074,-25.642)
NetR19_1: R19.1 U4.7 | length 16
  Top Layer w0.762: U4.7 84.074,-38.723 84.455,-39.104 86.233,-39.104 88.265,-41.136 88.265,-46.343 90.694,-48.772 R19.1
NetR20_1: R20.1 R26.1 | length 4.5
  Bottom Layer w0.762: R20.1 R26.1
NetR20_2: R20.2 R21.1 | length 2.3
  Top Layer w0.762: R21.1 96.123,-7.735 v2(97.206,-7.735)
  Bottom Layer w0.762: R20.2 v2(97.206,-7.735)
NetR21_2: R21.2 R22.1 | length 3.5
  Top Layer w0.762: R22.1 94.098,-11.164 R21.2
NetR23_2: R23.2 U5.2 | length 9
  Top Layer w0.762: U5.2@94.92,-24.55 94.92,-18.251 96.495,-16.676 R23.2
NetR24_1: R24.1 U5.7 | length 2.2
  Top Layer w0.508: R24.1 U5.7@94.92,-35.45
NetR26_2: R26.2 R27.1 | length 2.4
  Top Layer w0.762: R27.1 v2(97.233,-3.188)
  Bottom Layer w0.762: R26.2 96.123,-3.188 v2(97.233,-3.188)
NetR27_2: R27.2 R28.1 | length 5.3
  Top Layer w0.762: R28.1 92.602,-0.845 94.047,-2.29 R27.2@94.047,-2.718
NetR28_2: R28.2 R29.1 | length 2.6
  Top Layer w0.762: R28.2 89.824,-2.895 R29.1
NetR29_2: R29.2 R33.2 | length 2.6
  Top Layer w0.762: R33.2 87.798,-5.449 R29.2
NetR30_2: R30.2 R31.1 | length 2.6
  Top Layer w0.762: R30.2 83.201,0.037 R31.1
NetR31_2: R31.2 R32.1 | length 2.8
  Top Layer w0.762: R31.2 85.226,-2.617 R32.1
NetR32_2: R32.2 R33.1 | length 2.8
  Top Layer w0.762: R33.1 83.303,-5.373 R32.2
NU: R7.1 R10.1 U2.19 | length 4.5
  Bottom Layer w0.762: U2.19 36.448,-53.582 37.592,-53.582 38.608,-52.566 R10.1@39.624,-52.566
NV: R8.1 R12.1 U2.18 | length 4.2
  Bottom Layer w0.762: U2.18 37.368,-57.392 R12.1
NW: R9.1 R13.1 U2.17 | length 3.9
  Bottom Layer w0.762: U2.17 37.272,-62.218 R13.1
temp: C35.2 P8.2 R19.2 | length 4.9
  Top Layer w0.762: R19.2 92.694,-54.008 C35.2
V_DC: C38.2 P7.2 R24.2 | length 6.5
  Top Layer w0.762: C38.2 92.619,-42.777 92.989,-42.406 92.989,-40.476 93.844,-39.621 R24.2
Vdd1: C33.2 C34.2 R16.1 U3.4 U4.1 U5.1 | length 17.9
  Top Layer w0.762: U4.1 86.04,-25.962 C33.2 87.605,-25.835 U3.4
  Bottom Layer w0.762: R16.1 89.164,-23.991 U3.4 89.931,-23.508 v2(97.155,-23.508)
Vfo: R16.2 R17.1 U2.14 | length 63.5
  Bottom Layer w0.508: U2.14 61.417,-57.669 63.325,-55.762 67.712,-55.762 71.92,-59.97 78.956,-59.97 83.312,-55.614 83.312,-43.549 78.486,-38.723 78.486,-30.087 80.661,-27.912 R17.1
  Bottom Layer w0.762: R17.1 80.772,-26.547 80.772,-24.372 81.153,-23.991 R16.2
pads on no net: CC1.6 CC2.6 CC3.6 P1.0 P2.0 P3.0 P4.0 P5.0 P6.0 P7.0 P8.0 P8.1 U2.24

## Polygon pours and split planes (outlines as drawn)
-VDCBUS on Top Layer "Top Layer-No Net" (solid, pour order 29): 34.493,-9.64 31.953,-12.18 31.953,-15.99 33.858,-17.895 38.735,-17.895 42.545,-21.705 42.545,-64.504 40.081,-66.714 27.686,-66.714 27.686,-56.122 27.94,-55.868 28.829,-55.868 29.21,-55.36 29.21,-53.469 28.575,-52.693 24.346,-52.706 20.523,-56.691 20.523,-86.272 17.78,-89.015 12.065,-89.015 8.89,-85.84 8.89,-80.76 8.255,-80.125 -0.635,-80.125 -1.27,-80.76 -1.27,-89.916 0.254,-91.44 2.667,-91.44 4.826,-93.599 4.826,-96.012 6.084,-97.27 24.765,-97.27 69.85,-97.27 71.12,-96 71.12,-90.92 69.85,-89.65 31.877,-89.65 29.845,-87.803 29.845,-80.125 32.385,-77.585 46.355,-77.585 48.158,-75.782 48.158,-64.352 48.158,-20.537 50.8,-17.895 68.58,-17.895 70.485,-15.99 70.485,-11.454 68.366,-9.64
+VDCBUS on Top Layer "Top Layer-No Net" (solid, pour order 27): 38.362,-37.318 32.139,-37.318 27.322,-32.5 27.322,-25.515 20.701,-18.657 20.701,-9.005 18.288,-6.592 11.188,-6.592 8.89,-8.89 8.89,-15.24 8.255,-15.875 -0.635,-15.875 -1.27,-15.24 -1.27,-5.969 0.139,-4.56 2.044,-4.56 4.319,-2.285 4.316,-0.383 5.854,1.155 73.66,1.155 79.375,-4.56 79.375,-19.165 73.025,-25.515 58.42,-25.515 55.626,-28.309 55.626,-76.505 58.42,-79.49 68.085,-79.49 69.85,-81.395 69.85,-85.84 68.085,-87.745 34.29,-87.745 32.258,-85.713 32.258,-81.569 34.083,-79.744 47.523,-79.744 49.987,-77.28 49.987,-65.698 49.987,-22.518 52.07,-20.435 69.85,-20.435 73.025,-17.26 73.025,-10.275 70.307,-7.557 63.043,-7.557 32.848,-7.557 29.794,-10.611 29.794,-16.599 33.036,-19.8 37.236,-19.8 39.827,-21.996 39.827,-35.853
Gnd1 on Top Layer "Top Layer-No Net" (solid, remove dead copper, pour order 40): 60.706,-45.962 58.928,-47.74 58.928,-73.902 61.722,-76.696 70.612,-76.696 75.184,-81.268 82.296,-81.268 83.312,-79.744 86.995,-78.363 86.995,-54.217 80.518,-47.74 69.342,-47.74 67.564,-45.962
-VDCBUS on Bottom Layer "Top Layer-No Net" (solid, pour order 36): 34.493,-9.64 31.953,-12.18 31.953,-15.99 33.858,-17.895 38.735,-17.895 42.582,-21.742 42.582,-65.864 41.732,-66.714 27.686,-66.542 27.686,-56.122 27.94,-55.868 28.829,-55.868 29.21,-55.36 29.21,-53.463 28.575,-52.693 26.645,-52.718 24.409,-52.718 20.523,-56.605 20.523,-86.272 17.78,-89.015 12.065,-89.015 8.89,-85.84 8.89,-80.76 8.255,-80.125 -0.635,-80.125 -1.27,-80.76 -1.27,-89.916 0.254,-91.44 2.667,-91.44 4.826,-93.599 4.826,-96.012 6.084,-97.27 24.765,-97.27 69.85,-97.27 71.12,-96 71.12,-90.92 69.85,-89.65 31.877,-89.65 29.845,-87.803 29.845,-80.125 32.385,-77.585 46.355,-77.585 48.158,-75.782 48.158,-64.352 48.158,-20.537 50.8,-17.895 68.58,-17.895 70.485,-15.99 70.485,-11.454 68.366,-9.64
Gnd1 on Bottom Layer "Top Layer-No Net" (solid, remove dead copper, pour order 42): 60.706,-45.962 58.928,-47.74 58.928,-73.902 61.722,-76.696 70.612,-76.696 75.184,-81.268 82.296,-81.268 83.312,-79.744 87.249,-78.268 87.249,-60.313 86.106,-59.17 86.106,-45.227 84.301,-43.422 81.661,-43.422 80.899,-44.184 80.899,-47.232 80.391,-47.74 69.342,-47.74 67.564,-45.962
+VDCBUS on Bottom Layer "Top Layer-No Net" (solid, pour order 34): 38.481,-37.199 32.004,-37.199 27.322,-32.373 27.322,-25.515 20.701,-18.657 20.701,-9.005 18.288,-6.592 11.188,-6.592 8.89,-8.89 8.89,-15.24 8.255,-15.875 -0.635,-15.875 -1.27,-15.24 -1.27,-5.969 0.138,-4.561 2.043,-4.561 4.318,-2.286 4.318,-0.381 5.854,1.155 73.66,1.155 79.375,-4.56 79.375,-19.165 73.025,-25.515 58.42,-25.515 55.626,-28.309 55.626,-76.505 58.42,-79.49 67.945,-79.49 69.85,-81.395 69.85,-85.84 68.085,-87.745 34.29,-87.745 32.258,-85.713 32.258,-81.569 34.083,-79.744 47.523,-79.744 49.987,-77.28 49.987,-65.698 49.987,-22.518 52.07,-20.435 69.85,-20.435 73.025,-17.26 73.025,-10.275 70.307,-7.557 63.043,-7.557 32.848,-7.557 29.794,-10.611 29.794,-16.599 33.036,-19.8 37.236,-19.8 39.827,-21.996 39.827,-35.853

## Keep-outs
Keep-Out Layer:
  pour cut-out: 20.166,-54.825 cw(c19.812,-54.471) 19.458,-54.117 22.19,-51.385 ccw(c22.544,-51.739) 22.19,-51.385 cw(c22.544,-51.739) 22.544,-51.239 38.1,-51.239 cw(c38.1,-51.739) 38.6,-51.739 cw(c38.1,-51.739) 38.1,-52.239 22.751,-52.239

## Other copper
Top Layer:
  rectangle net 5Vdc4: 95.885,-36.361 97.384,-34.557
  rectangle net 5gnd4: 92.177,-36.539 93.929,-34.405
  region net NetCC3_1: 13.335,-61.253 13.589,-61.507 15.824,-61.507 16.942,-60.389 16.942,-57.951 14.986,-57.951 13.335,-59.602
  region net NetCC2_1: 13.335,-42.177 13.589,-42.431 15.824,-42.431 17.577,-42.431 17.577,-39.536 16.916,-38.875 14.986,-38.875 13.335,-40.526
  region net NetCC3_3: 1.905,-65.226 2.159,-65.48 5.461,-65.48 5.715,-65.226 5.715,-61.67 5.969,-61.416 12.827,-61.416 13.081,-61.162 13.081,-59.511 11.43,-57.86 2.921,-57.86 1.905,-58.876
  region net NetCC2_3: 1.905,-46.196 2.159,-46.45 5.461,-46.45 5.715,-46.196 5.715,-42.64 5.969,-42.386 12.827,-42.386 13.081,-42.132 13.081,-40.481 11.43,-38.83 2.921,-38.83 1.905,-39.846
  region net NetCC1_1: 13.335,-23.102 13.589,-23.356 15.824,-23.356 17.577,-23.356 17.577,-20.46 16.916,-19.8 14.986,-19.8 13.335,-21.451
  region net NetCC1_3: 1.905,-27.166 2.159,-27.42 5.461,-27.42 5.715,-27.166 5.715,-23.61 5.969,-23.356 12.827,-23.356 13.081,-23.102 13.081,-21.451 11.43,-19.8 2.921,-19.8 1.905,-20.816
  region net NU: 30.429,-52.693 37.643,-52.693 38.456,-53.506 38.456,-55.335 37.541,-56.249 30.429,-56.249
  region net NW: 30.429,-61.888 37.643,-61.888 38.456,-62.701 38.456,-64.529 37.541,-65.444 30.429,-65.444
  region net Gnd1: 91.44,-16.117 93.091,-16.117 93.726,-15.482 95.123,-15.482 95.123,-16.879 93.777,-18.225 93.777,-29.274 92.329,-30.722 88.011,-30.722 86.741,-29.452 86.741,-27.064 89.51,-27.064 90.678,-25.896 90.678,-23.61 89.662,-22.594 89.662,-17.895
  region net Vdd1: 95.885,-18.657 97.536,-18.657 97.663,-18.784 97.663,-25.388 97.409,-25.642 96.012,-25.642 95.758,-25.388 95.758,-18.784
  region net Gnd1: 85.09,-22.848 83.058,-24.88 83.058,-27.674 82.169,-28.563 80.01,-28.563 80.01,-33.77 80.018,-39.112 86.106,-45.2 86.106,-53.455 84.582,-53.455 80.137,-49.01 80.137,-47.74 80.391,-47.74 80.899,-47.232 80.899,-42.025 78.486,-39.612 78.486,-26.277 83.884,-20.879 87.694,-20.879 89.725,-18.847 89.662,-22.848
Bottom Layer:
  region net NetCC3_3: 1.905,-65.226 2.159,-65.48 5.461,-65.48 5.715,-65.226 5.715,-61.67 5.969,-61.416 10.033,-61.416 10.287,-61.162 10.287,-58.876 10.033,-58.622 2.921,-58.622 1.905,-59.638
  region net NetCC2_3: 1.905,-46.196 2.159,-46.45 5.461,-46.45 5.715,-46.196 5.715,-42.64 5.969,-42.386 10.033,-42.386 10.287,-42.132 10.287,-39.846 10.033,-39.592 2.921,-39.592 1.905,-40.608
  region net NetCC1_3: 1.905,-27.166 2.159,-27.42 5.461,-27.42 5.715,-27.166 5.715,-23.61 5.969,-23.356 10.033,-23.356 10.287,-23.102 10.287,-20.816 10.033,-20.562 2.921,-20.562 1.905,-21.578
  region net NV: 30.424,-57.341 37.638,-57.341 38.451,-58.154 38.451,-59.983 37.536,-60.897 30.424,-60.897

## Silkscreen, mask and mechanical layers (free items; w line width, h text height)
Top Overlay:
  circle w2: c14.995,-83.935 r3.061
  circle w2: c86.995,-83.935 r3.175
  circle w2: c86.995,-11.935 r3.423
  circle w2: c14.995,-11.935 r3.17
  text "Inverter REV3.0 / v.morais@fe.up.pt" at 95.123,-89.269 h0.76 r90
  text "TOP" at 85.598,-95.746 h1.52
Bottom Overlay:
  circle w2: c14.995,-83.935 r3.328
  circle w2: c86.995,-83.935 r3.175
  circle w2: c86.995,-11.935 r3.423
  circle w2: c14.995,-11.935 r3.242
  text "BOT" at 89.154,-95.746 h1.52
Top Solder:
  rectangle: 13.513,-61.253 15.469,-59.653
  rectangle: 13.513,-42.177 15.469,-40.577
  rectangle: 13.513,-23.102 15.469,-21.502
  region: 1.905,-65.226 2.159,-65.48 5.461,-65.48 5.715,-65.226 5.715,-61.67 5.969,-61.416 12.344,-61.416 12.649,-61.111 12.649,-59.46 11.811,-58.622 2.921,-58.622 1.905,-59.638
  region: 1.905,-46.196 2.159,-46.45 5.461,-46.45 5.715,-46.196 5.715,-42.64 5.969,-42.386 12.344,-42.386 12.649,-42.081 12.649,-40.43 11.811,-39.592 2.921,-39.592 1.905,-40.608
  region: 38.1,-37.072 39.497,-35.675 39.497,-22.34 37.338,-20.181 32.766,-20.181 29.21,-16.625 29.21,0.762 6.604,0.762 5.334,-0.508 5.337,-2.537 2.286,-5.588 0.508,-5.588 -0.635,-6.731 -0.635,-14.605 -0.127,-15.113 7.62,-15.113 8.255,-14.478 8.255,-8.636 10.934,-5.957 19.177,-5.957 21.336,-8.116 21.336,-18.913 27.504,-25.333 27.504,-32.064 32.512,-37.072
  region: 30.429,-52.693 37.643,-52.693 38.456,-53.506 38.456,-55.335 37.541,-56.249 30.429,-56.249
  region: 30.429,-61.888 37.643,-61.888 38.456,-62.701 38.456,-64.529 37.541,-65.444 30.429,-65.444
  region: 25.132,-52.707 28.575,-52.693 29.21,-53.455 29.21,-55.36 28.829,-55.868 27.94,-55.868 27.686,-56.122 27.761,-96.889 6.465,-96.889 5.334,-95.758 5.334,-92.991 3.148,-90.805 0.381,-90.805 -0.762,-89.662 -0.762,-81.395 -0.127,-80.76 7.493,-80.76 8.255,-81.522 8.255,-87.745 10.795,-90.285 18.415,-90.285 21.971,-86.729 21.971,-81.014 21.093,-80.136 21.024,-56.815
  region: 1.905,-27.166 2.159,-27.42 5.461,-27.42 5.715,-27.166 5.715,-23.61 5.969,-23.356 12.344,-23.356 12.649,-23.051 12.649,-21.4 11.811,-20.562 2.921,-20.562 1.905,-21.578
Bottom Solder:
  region: 30.424,-57.341 37.638,-57.341 38.451,-58.154 38.451,-59.983 37.536,-60.897 30.424,-60.897